# EAGLE board 07D-010 (EAGLE 6.3)

Size 15 x 8.5 mm. Coordinates in mm from the lower left corner, seen from the top.
Outline: 0,0 0,8.5 15,8.5 15,0 0,0
Copper layers (1*16): Top 0.035mm / dielectric 1.5mm / Bottom 0.035mm
Design rules "default": minimum track width 10mil, minimum drill 24mil, track to track 8mil, track to pad 8mil, pad to pad 8mil, via to via 8mil, smd to smd 8mil, copper to edge 40mil, drill to drill 8mil, minimum pad ring 10mil, minimum via ring 8mil, stop-mask expansion 4mil, vias tented up to drill 0mil, thermal gap 10mil

## Footprints (pad centres in the part's own frame; a part is rotated, then mirrored left to right if it is on the bottom)
MIC_SPH0645LM4H-B = smd 0.6 x 0.522: 1 -0.9,2.074; 2 -0.9,1.252; 4 0.9,1.252; 5 0.9,2.074; 6 0,2.074 | smd 0.1 x 0.1: 3 0.65,0.02 | hole 0.5: 0,0
PINS_1_20P = drill 0.8 square: P$1 0,0; P$2 2.54,0; P$3 5.08,0; P$4 7.62,0; P$5 10.16,0; P$6 12.7,0; P$7 15.24,0; P$8 17.78,0; P$9 20.32,0; P$10 22.86,0; P$11 25.4,0; P$12 27.94,0; P$13 30.48,0; P$14 33.02,0; P$15 35.56,0; P$16 38.1,0; P$17 40.64,0; P$18 43.18,0; P$19 45.72,0; P$20 48.26,0; P$21 0,2.54; P$22 2.54,2.54; P$23 5.08,2.54; P$24 7.62,2.54; P$25 10.16,2.54; P$26 12.7,2.54; P$27 15.24,2.54; P$28 17.78,2.54; P$29 20.32,2.54; P$30 22.86,2.54; P$31 25.4,2.54; P$32 27.94,2.54; P$33 30.48,2.54; P$34 33.02,2.54; P$35 35.56,2.54; P$36 38.1,2.54; P$37 40.64,2.54; P$38 43.18,2.54; P$39 45.72,2.54; P$40 48.26,2.54

## Placement (x,y rotation side)
MK1  SPH0645LM4H-B  [MIC_SPH0645LM4H-B]  13.5,4 90 top
MK2  SPH0645LM4H-B  [MIC_SPH0645LM4H-B]  1.5,4 270 top
U$1  BTM525  [PINS_1_20P]  0.5,-5.5 0 top

## Library data of the parts
MK1 MK2 = utsa; DESCRIPTION: 20 Hz ~ 10 kHz Digital, I²S Microphone MEMS (Silicon) 1.62 V ~ 3.6 V Omnidirectional (-26dB ±3dB @ 94dB SPL) Solder Pads; DIGI-KEY_PART_NUMBER: 423-1405-2-ND; MF: Knowles; MP: SPH0645LM4H-B; PACKAGE: None; PURCHASE-URL: https://pricing.snapeda.com/search/part/SPH0645LM4H-B/?ref=eda
U$1 = minipcb

## Nets
GND: MK1.3 MK2.3
VDD: MK1.5 MK2.5

## Tracks (layer width: path | path; a pad name or v marks a point on that pad's centre or on a via)
GND  (1 unrouted)
VDD  (1 unrouted)